# Altium PCB 16_Electrodes.PcbDoc
Units mm, origin at the board's own origin, x right, y up, seen from the top; angles counter-clockwise.
Board outline 53.68 x 41.91 mm, 2 copper layers (Top Layer, Bottom Layer); 1 components, 0 nets, 50 pads, 0 vias.
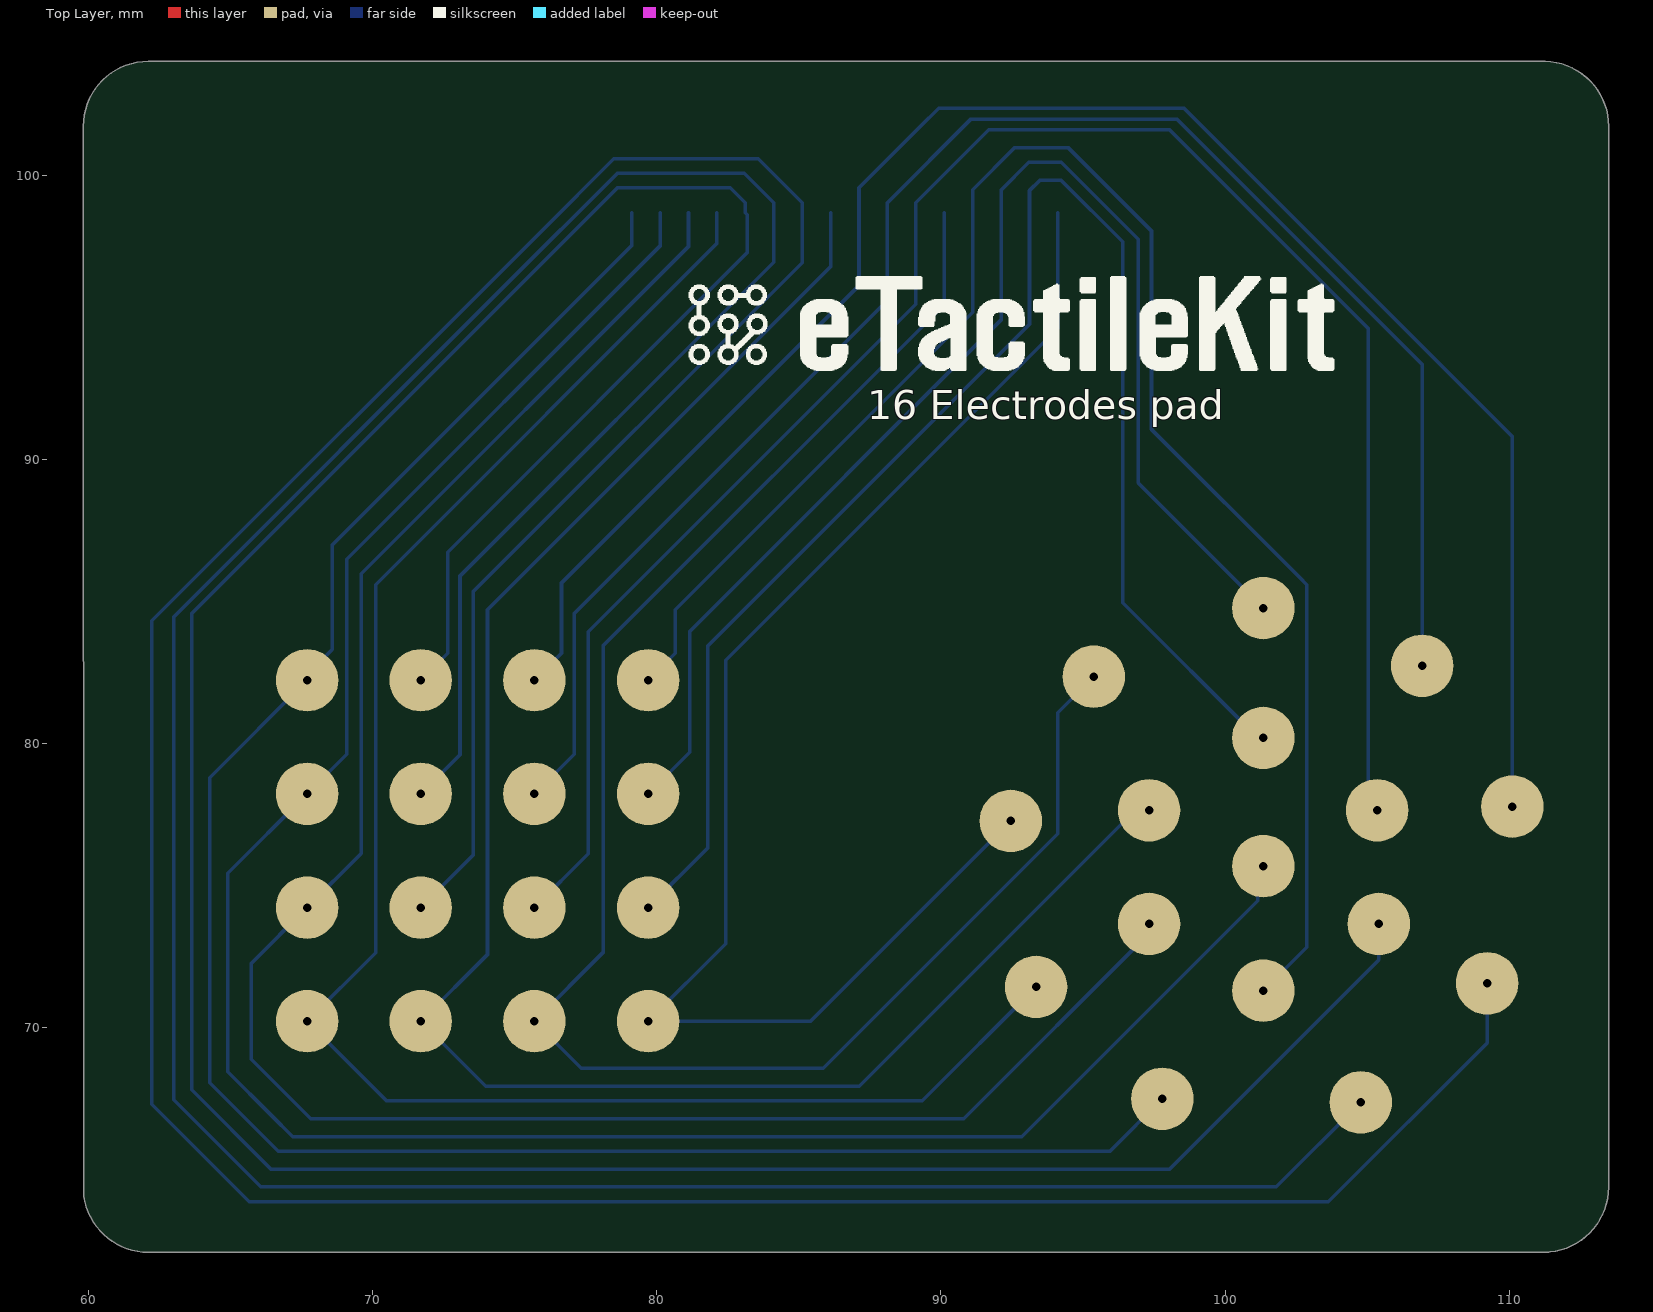
[diagram p0: Top Layer view]
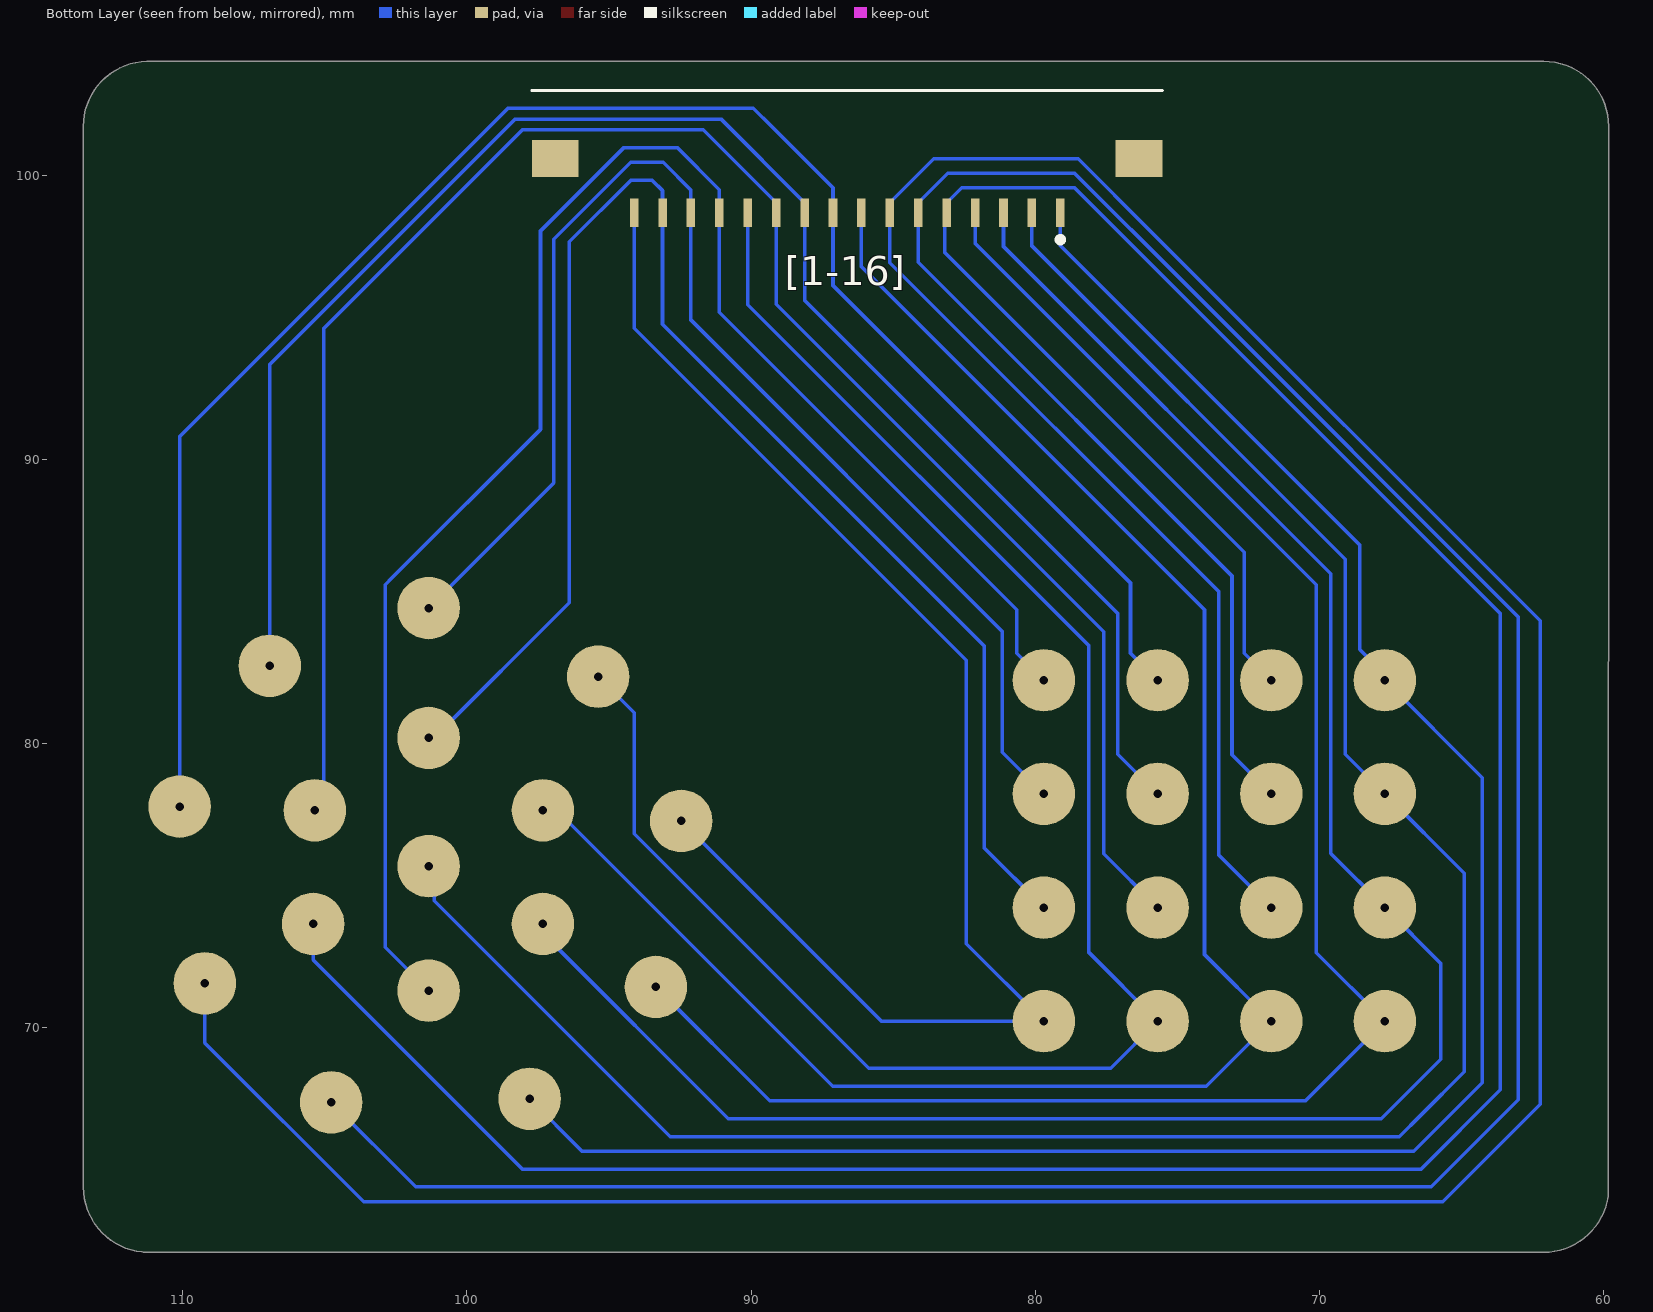
[diagram p1: Bottom Layer view, seen from below]

## Layer stack, top to bottom
Top Solder: solder mask 0.0102, Solder Resist, Dk 3.5
Top Layer: signal copper 0.0356
Dielectric 1: dielectric 0.32, FR-4, Dk 4.8
Bottom Layer: signal copper 0.0356
Bottom Solder: solder mask 0.0102, Solder Resist, Dk 3.5

## Board outline
59.84,64.061 ccw(c62.103,64.389) 62.102,62.103 62.103,62.103 79.375,62.103 111.379,62.103 111.431,62.114 ccw(c111.205,64.389) 113.491,64.389 113.497,101.696 113.497,101.724 ccw(c111.211,101.724) 111.267,104.01 111.238,104.013 62.103,104.013 ccw(c62.103,101.727) 59.817,101.727

## Design rules (kind name [scope] priority, off if disabled: settings)
BoardOutlineClearance [All] p1: gap=0.2 ignorepadtopadclearanceinfootprint=FALSE
Clearance [All] p1: gap=0.127 ignorepadtopadclearanceinfootprint=FALSE except(0.25: Arc-Hole Track-Hole SMDPad-Hole THPad-Hole Via-Hole Fill-Hole Poly-Hole Region-Hole Text-Hole)
ComponentClearance [All] p1: gap=0.127 collisioncheckmode=3 verticalgap=0.127 showdistances=TRUE
DiffPairsRouting [All] p1: maxlimit=0.254 minlimit=0.127 mostfreqgap=0.127 toplayer_minwidth=0.127 toplayer_maxwidth=25.4 toplayer_prefwidth=0.127 bottomlayer_minwidth=0.127 bottomlayer_maxwidth=25.4 bottomlayer_prefwidth=0.127 maxuncoupledlength=12.7
Height [All] p1: minheight=0 maxheight=1816.048 prefheight=12.7
HoleSize [All] p1: absolutevalues=TRUE maxlimit=6.3 minlimit=0.3 maxpercent=80.000 minpercent=20.000
HoleToHoleClearance [All] p1: gap=0.25 allowstackedmicrovias=FALSE
MinimumAnnularRing [All] p1: minimumring=0.076
MinimumSolderMaskSliver [All] p1: minsoldermaskwidth=0
PlaneClearance [All] p1: clearance=0.127
PlaneConnect PlaneConnectPowerPads [InPadClass('PowerPads')] p1: planeconnectstyle=Direct reliefexpansion=0.508 reliefentries=4 reliefconductorwidth=0.254 reliefairgap=0.254
PlaneConnect [All] p2: pad.planeconnectstyle=Relief pad.reliefexpansion=0.3 pad.reliefentries=4 pad.reliefconductorwidth=0.127 pad.reliefairgap=0.127 via.planeconnectstyle=Direct via.reliefexpansion=0.3 via.reliefentries=4 via.reliefconductorwidth=0.127 via.reliefairgap=0.127
PolygonConnect PolygonConnectPowerPads [All vs (InPadClass('PowerPads'))] p1: connectstyle=Direct reliefconductorwidth=0.254 reliefentries=4 polygonreliefangle="90 Angle" airgapwidth=0.254
PolygonConnect [All] p2: thpad.connectstyle=Relief thpad.reliefconductorwidth=0.127 thpad.reliefentries=4 thpad.polygonreliefangle="90 Angle" thpad.airgapwidth=0.127 smdpad.connectstyle=Relief smdpad.reliefconductorwidth=0.127 smdpad.reliefentries=4 smdpad.polygonreliefangle="90 Angle" smdpad.airgapwidth=0.127 via.connectstyle=Direct via.reliefconductorwidth=0.127 via.reliefentries=4 via.polygonreliefangle="90 Angle" via.airgapwidth=0.127
RoutingVias [All] p1: holewidth=0.3 width=0.6 viastyle="Through Hole" minholewidth=0.3 minwidth=0.6 maxholewidth=0.6 maxwidth=6.6
SilkToSilkClearance [All] p1: silktosilkclearance=0
SilkToSolderMaskClearance [IsPad] p1: minsilkscreentomaskgap=0.127 clearancetoexposedcopper=TRUE
SolderMaskExpansion [All] p1: expansion=0.075 istentingtop=FALSE
Width [All] p1: maxlimit=0.127 minlimit=0.127 preferedwidth=0.127
20 further rules are at their usual default settings.

## Components (designator, comment, footprint, x,y, rotation, side; value= is the part's Value field where it differs from the comment)
[1-16] "686116183422" 686116183422 86.614,100.838 r0 bottom (schematic designator P1)

## Footprints (in the part's own frame and the unit in brackets; to place one, negate y for a bottom-side part, rotate by r counter-clockwise, add the part's x,y. Pads: shape width x height; smd on the part's side, far side on the other; paste and mask are expansions set on the pad)
686116183422 [mm]
  rect 0.3x1 smd: 1(-7.5,2.15) 2(-6.5,2.15) 3(-5.5,2.15) 4(-4.5,2.15) 5(-3.5,2.15) 6(-2.5,2.15) 7(-1.5,2.15) 8(-0.5,2.15) 9(0.5,2.15) 10(1.5,2.15) 11(2.5,2.15) 12(3.5,2.15) 13(4.5,2.15) 14(5.5,2.15) 15(6.5,2.15) 16(7.5,2.15)
  rect 1.65x1.3 smd: MP1(10.275,0.25) MP2(-10.275,0.25)
  silkscreen extent -11.1,-2.15 11.1,3.2, body extent -11.1,-2.15 11.1,2.62, height 1.4

## Part data
[1-16]: "Wurth Elektronik WR-FPC Series 1mm Pitch 16 Way Horizontal SMT Female FPC Connector, Top Contact", Manufacturer_Name="Wurth Elektronik", Mouser Part Number=710-686116183422, Datasheet Link=https://componentsearchengine.com/Datasheets/1/686116183422.pdf, Geometry.Height=1.3mm, Manufacturer_Part_Number=686116183422, Mouser Price/Stock=https://www.mouser.co.uk/ProductDetail/Wurth-Elektronik/686116183422?qs=5aG0NVq1C4zMCTkNAYvBmg%3D%3D

## Free pads (board coordinates)
  round 2.2 hole 0.3: 263(71.691,82.232) 263(79.692,82.232) 263(97.321,77.655) 263(105.346,77.655) 264(71.691,78.232) 264(79.692,78.232) 264(97.321,73.655) 264(105.41,73.655) 265(71.691,74.232) 265(79.692,74.232) 265(95.377,82.36) 265(109.22,71.565) 266(71.691,70.232) 266(79.692,70.232) 266(104.775,67.374) 266(110.109,77.788) 267(67.691,82.232) 267(75.692,82.232) 267(101.346,80.201) 267(101.346,84.773) 268(67.691,78.232) 268(75.692,78.232) 268(92.456,77.28) 268(101.346,75.692) 269(67.691,74.232) 269(75.692,74.232) 269(93.345,71.438) 269(101.346,71.311) 270(67.691,70.232) 270(75.692,70.232) 270(97.79,67.501) 270(106.934,82.741)

## Nets (pads, with @x,y where several pads share a name; then routed paths per layer and width w, separated by ;. In a path a pad name is that pad's centre, name@x,y a point inside that pad or via, vN(x,y) a via of type N, cw(c..) or ccw(c..) an arc to the next point about the centre after c; other vN are vias at no path point)
pads on no net: [1-16].1 [1-16].2 [1-16].3 [1-16].4 [1-16].5 [1-16].6 [1-16].7 [1-16].8 [1-16].9 [1-16].10 [1-16].11 [1-16].12 [1-16].13 [1-16].14 [1-16].15 [1-16].16 [1-16].MP1 [1-16].MP2
copper on no net: | length 1174
  Bottom Layer w0.127: 71.691,74.232 73.533,76.074 73.533,85.344 85.114,96.925 85.114,98.688 85.114,99.038 83.568,100.584 83.566,100.584 78.486,100.584 75.946,98.044 62.23,84.328 62.23,67.31 65.659,63.881 103.632,63.881 109.22,69.469 109.22,71.565 ; 71.691,78.232 73.073,79.614 73.073,85.9 84.114,96.941 84.114,98.688 84.114,99.038 83.076,100.076 78.613,100.076 74.676,96.139 62.995,84.458 62.995,67.465 66.058,64.402 101.803,64.402 104.775,67.374 ; 71.691,82.232 72.644,83.185 72.644,86.741 83.185,97.282 83.185,98.617 83.114,98.688 83.114,99.038 82.584,99.568 78.613,99.568 78.232,99.187 63.629,84.584 63.629,67.816 66.421,65.024 98.044,65.024 105.41,72.39 105.41,73.655 ; 75.692,74.232 77.59,76.13 77.59,83.94 89.114,95.464 89.114,98.688 89.114,99.038 91.676,101.6 98.044,101.6 103.378,96.266 105.029,94.615 105.029,77.972 105.346,77.655 ; 75.692,78.232 77.089,79.629 77.089,84.582 88.114,95.607 88.114,98.688 88.114,99.038 91.057,101.981 98.298,101.981 103.886,96.393 106.934,93.345 106.934,82.741 ; 75.692,82.232 76.646,83.186 76.646,85.658 87.114,96.125 87.114,98.688 87.114,99.56 89.281,101.727 89.916,102.362 98.552,102.362 104.394,96.52 110.109,90.805 110.109,77.788 ; 79.114,98.688 79.114,97.529 68.58,86.995 68.58,83.317 67.691,82.428 67.691,82.232 64.262,78.803 64.262,68.834 64.262,68.072 66.675,65.659 95.948,65.659 97.79,67.501 ; 79.692,74.232 81.788,76.328 81.788,83.439 93.114,94.765 93.114,98.688 93.114,99.464 93.472,99.822 94.234,99.822 96.393,97.663 96.393,84.963 101.155,80.201 101.346,80.201 ; 79.692,78.232 81.153,79.693 81.153,83.947 92.114,94.908 92.114,98.688 92.114,99.48 93.091,100.457 94.234,100.457 96.943,97.748 96.943,89.176 101.346,84.773 ; 79.692,82.232 80.645,83.185 80.645,84.709 91.114,95.178 91.114,98.688 91.114,99.496 92.583,100.965 94.488,100.965 97.409,98.044 97.409,91.059 102.616,85.852 102.87,85.598 102.87,72.835 101.346,71.311 ; 80.114,98.688 80.114,97.513 69.088,86.487 69.088,80.01 69.088,79.629 67.691,78.232 64.897,75.438 64.897,69.215 64.897,68.453 66.421,66.929 67.183,66.167 91.313,66.167 92.837,66.167 101.146,74.476 101.146,75.492 101.346,75.692 ; 81.114,98.688 81.114,97.497 69.596,85.979 69.596,76.137 67.691,74.232 65.722,72.263 65.722,68.898 66.167,68.453 67.818,66.802 90.805,66.802 97.321,73.318 97.321,73.655 ; 82.114,98.688 82.114,97.608 70.104,85.598 70.104,72.645 67.691,70.232 70.486,67.437 89.344,67.437 93.345,71.438 ; 86.114,98.688 86.114,96.782 74.041,84.709 74.041,72.582 71.691,70.232 73.978,67.945 87.122,67.945 96.832,77.655 97.321,77.655 ; 90.114,98.688 90.114,95.448 78.108,83.442 78.108,72.648 75.692,70.232 77.344,68.58 85.852,68.58 94.107,76.835 94.107,81.09 95.377,82.36 ; 92.456,77.28 85.408,70.232 79.692,70.232 82.423,72.963 82.423,82.931 94.114,94.622 94.114,98.688

## Silkscreen, mask and mechanical layers (free items; w line width, h text height)
Top Overlay:
  drawing of 18 lines, arcs and shapes, not listed
  text "16 Electrodes pad" at 87.401,91.423 h1.02
Mechanical 1:
  lines w0.254: 59.944,64.135 59.944,101.727 cw(c62.103,101.727) 62.103,103.886 111.238,103.886 ; 59.944,64.389 ccw(c62.103,64.389) 62.103,62.23 79.375,62.23 111.379,62.23 ; 111.205,62.23 ccw(c111.205,64.389) 113.364,64.389 113.37,101.697 ccw(c111.211,101.724) 111.238,103.883